# EAGLE board LED_board (EAGLE 7.4.0)
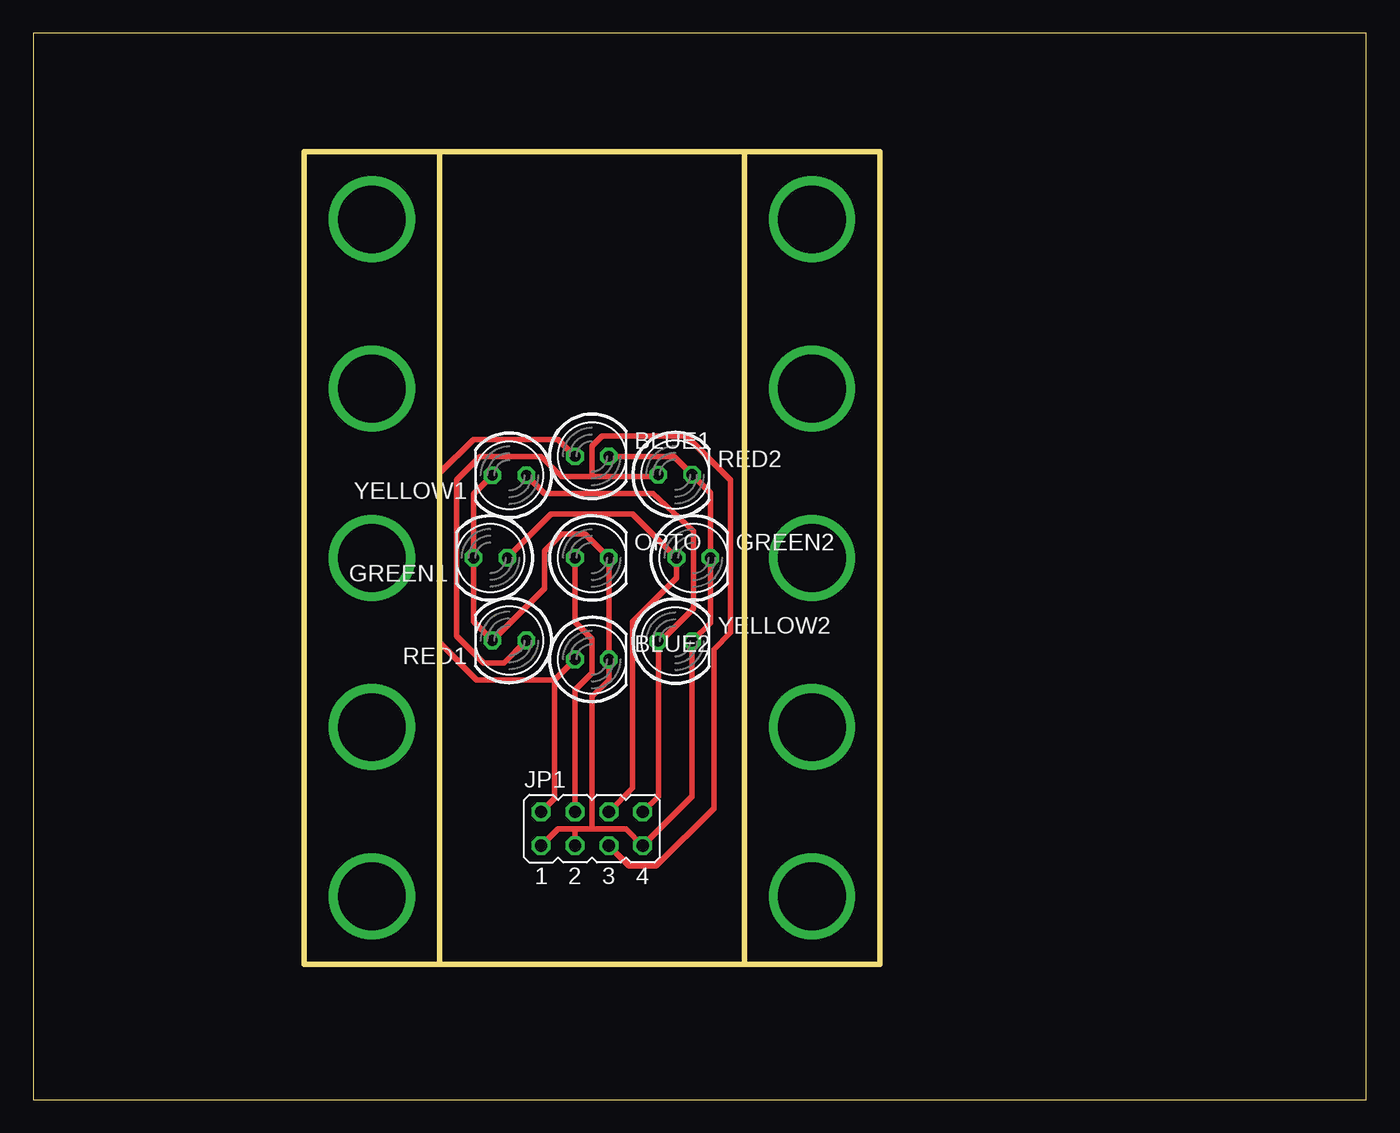
[diagram p0: board, top side]

Size 100 x 80 mm. Coordinates in mm from the lower left corner, seen from the top.
Outline: 30.48,71.12 53.34,71.12
Outline: 53.34,71.12 63.5,71.12 63.5,10.16 53.34,10.16
Outline: 30.48,10.16 20.32,10.16 20.32,71.12 30.48,71.12
Outline: 30.48,71.12 30.48,10.16
Outline: 30.48,10.16 53.34,10.16
Outline: 53.34,10.16 53.34,71.12
Outline: 0,0 100,0 100,80 0,80 0,0
Copper layers (1*16): Top 0.035mm / dielectric 1.5mm / Bottom 0.035mm
Design rules "default": minimum track width 10mil, minimum drill 24mil, track to track 8mil, track to pad 8mil, pad to pad 8mil, via to via 8mil, smd to smd 8mil, copper to edge 40mil, drill to drill 8mil, minimum pad ring 10mil, minimum via ring 8mil, stop-mask expansion 4mil, vias tented up to drill 0mil, thermal gap 10mil

## Footprints (pad centres in the part's own frame; a part is rotated, then mirrored left to right if it is on the bottom)
LED5MM = drill 0.813 octagon: A -1.27,0; K 1.27,0
JP4Q = drill 0.914 octagon: 1 -3.81,-1.27; 2 -3.81,1.27; 3 -1.27,-1.27; 4 -1.27,1.27; 5 1.27,-1.27; 6 1.27,1.27; 7 3.81,-1.27; 8 3.81,1.27

## Placement (x,y rotation side)
BLUE1  [LED5MM]  41.91,48.26 0 top
BLUE2  [LED5MM]  41.91,33.02 0 top
GREEN1  [LED5MM]  34.29,40.64 180 top
GREEN2  [LED5MM]  49.53,40.64 0 top
JP1  [JP4Q]  41.91,20.32 0 top
OPTO  [LED5MM]  41.91,40.64 0 top
RED1  [LED5MM]  35.71,34.44 180 top
RED2  [LED5MM]  48.16,46.89 0 top
YELLOW1  [LED5MM]  35.71,46.84 180 top
YELLOW2  [LED5MM]  48.16,34.39 0 top

## Library data of the parts
BLUE1 BLUE2 GREEN1 GREEN2 OPTO RED1 RED2 YELLOW1 YELLOW2 = led
JP1 = jumper

## Nets
GND: BLUE1.K BLUE2.K GREEN1.K GREEN2.K JP1.1 JP1.3 JP1.7 OPTO.K RED1.K RED2.K YELLOW1.K YELLOW2.K
N$1: JP1.5 RED1.A RED2.A
N$2: GREEN1.A GREEN2.A JP1.6
N$3: BLUE1.A BLUE2.A JP1.2
N$4: JP1.8 YELLOW1.A YELLOW2.A
N$5: JP1.4 OPTO.A

## Tracks (layer width: path | path; a pad name or v marks a point on that pad's centre or on a via)
GND
  Top 0.406: BLUE1.K 48.06,48.26 RED2.K 50.8,45.52 GREEN2.K 50.8,35.76 YELLOW2.K 49.43,22.76 JP1.7 44.45,20.32 41.91,20.32 | YELLOW1.K 33.02,45.41 GREEN1.K 33.02,35.87 RED1.K 38.35,38.35 38.35,41.15 39.62,42.42 41.4,42.42 OPTO.K BLUE2.K 43.18,31.5 41.91,30.23 41.91,20.32 | JP1.1 39.37,20.32 40.64,20.32 | 40.64,20.32 41.91,20.32 | JP1.3 40.64,20.32
N$1
  Top 0.406: 46.79,46.99 RED2.A 46.74,46.74 41.91,46.74 | JP1.5 44.7,17.53 46.74,17.53 51.05,21.84 51.05,33.78 52.32,35.05 52.32,46.48 49.02,49.78 42.67,49.78 41.91,49.02 41.91,46.74 | RED1.A 35.31,32.77 33.78,32.77 31.75,34.8 31.75,46.48 33.53,48.26 38.1,48.26 39.62,46.74 41.91,46.74
N$2
  Top 0.406: GREEN1.A 38.86,43.94 44.96,43.94 GREEN2.A 48.26,39.12 44.96,35.81 44.96,23.37 JP1.6
N$3
  Top 0.406: BLUE1.A 39.37,49.53 33.02,49.53 30.48,46.99 30.48,34.29 33.27,31.5 39.12,31.5 | BLUE2.A 39.12,31.5 | 39.12,31.5 39.12,22.61 JP1.2
N$4
  Top 0.406: YELLOW1.A 38.35,45.47 46.48,45.47 49.53,42.67 49.53,36.83 47.09,34.39 YELLOW2.A 46.89,22.76 JP1.8
N$5
  Top 0.406: OPTO.A 40.64,35.81 41.91,34.54 41.91,32 40.64,30.73 JP1.4
N$6  (via drill 5.08 pad 6.45)
  other vias: 58.42,66.04
N$7  (via drill 5.08 pad 6.45)
  other vias: 58.42,53.34
N$8  (via drill 5.08 pad 6.45)
  other vias: 58.42,40.64
N$9  (via drill 5.08 pad 6.45)
  other vias: 58.42,27.94
N$10  (via drill 5.08 pad 6.45)
  other vias: 25.4,15.24
N$11  (via drill 5.08 pad 6.45)
  other vias: 25.4,27.94
N$12  (via drill 5.08 pad 6.45)
  other vias: 25.4,40.64
N$13  (via drill 5.08 pad 6.45)
  other vias: 25.4,53.34
N$14  (via drill 5.08 pad 6.45)
  other vias: 25.4,66.04
N$15  (via drill 5.08 pad 6.45)
  other vias: 58.42,15.24